# Altium PCB Pwr_PCB1.PcbDoc
Units mil, origin at the board's own origin, x right, y up, seen from the top; angles counter-clockwise.
Board outline 3900 x 3900 mil, 2 copper layers (Top Layer, Bottom Layer), stack 61.756 mil thick; 56 components, 20 nets, 130 pads, 18 vias.
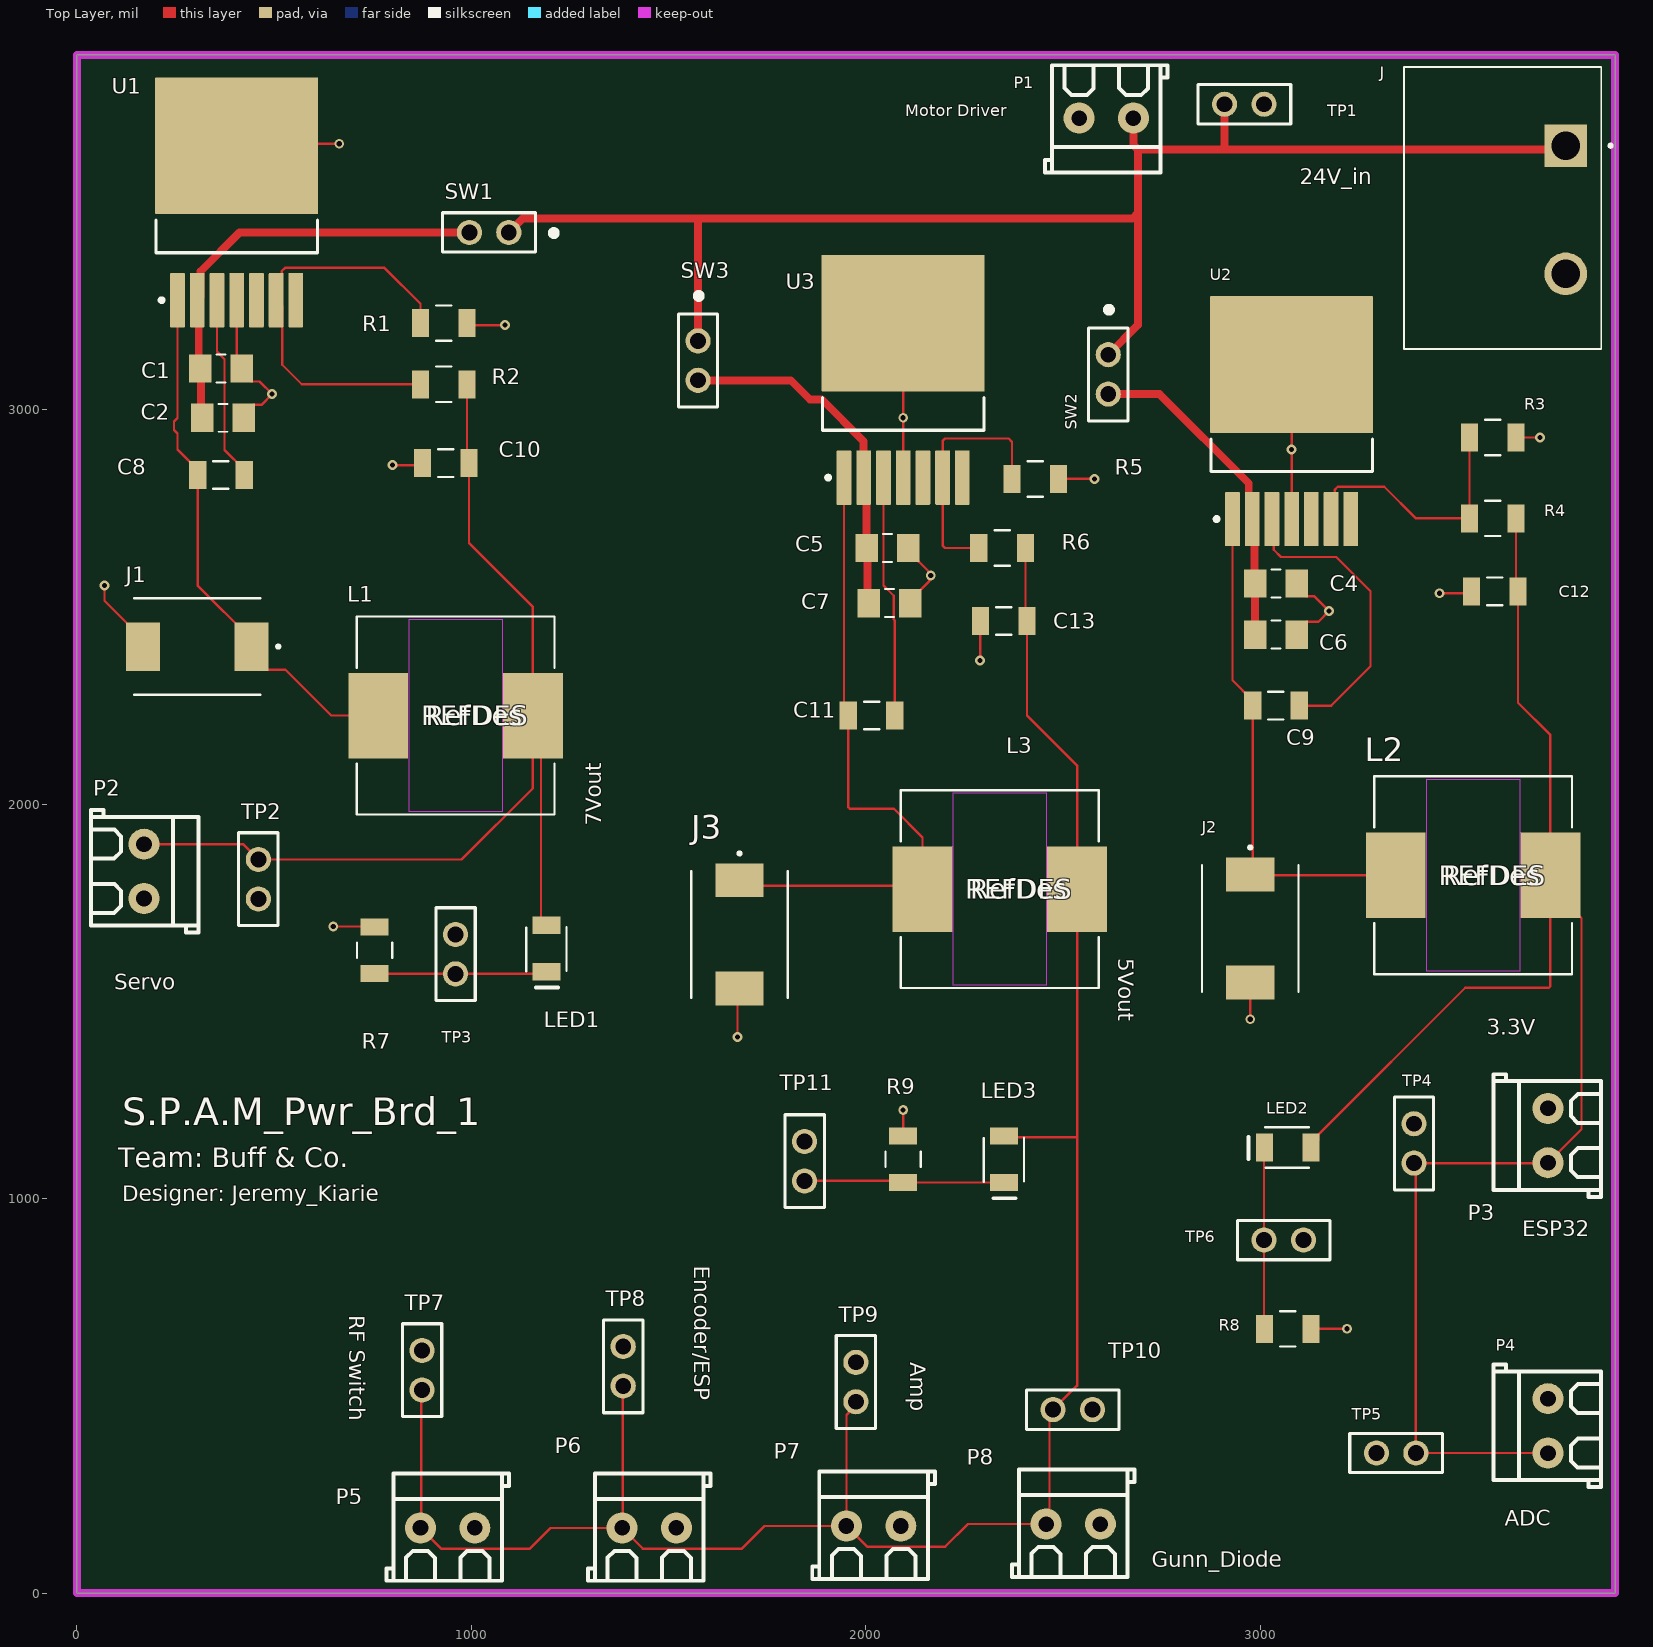
[diagram p0: Top Layer view]
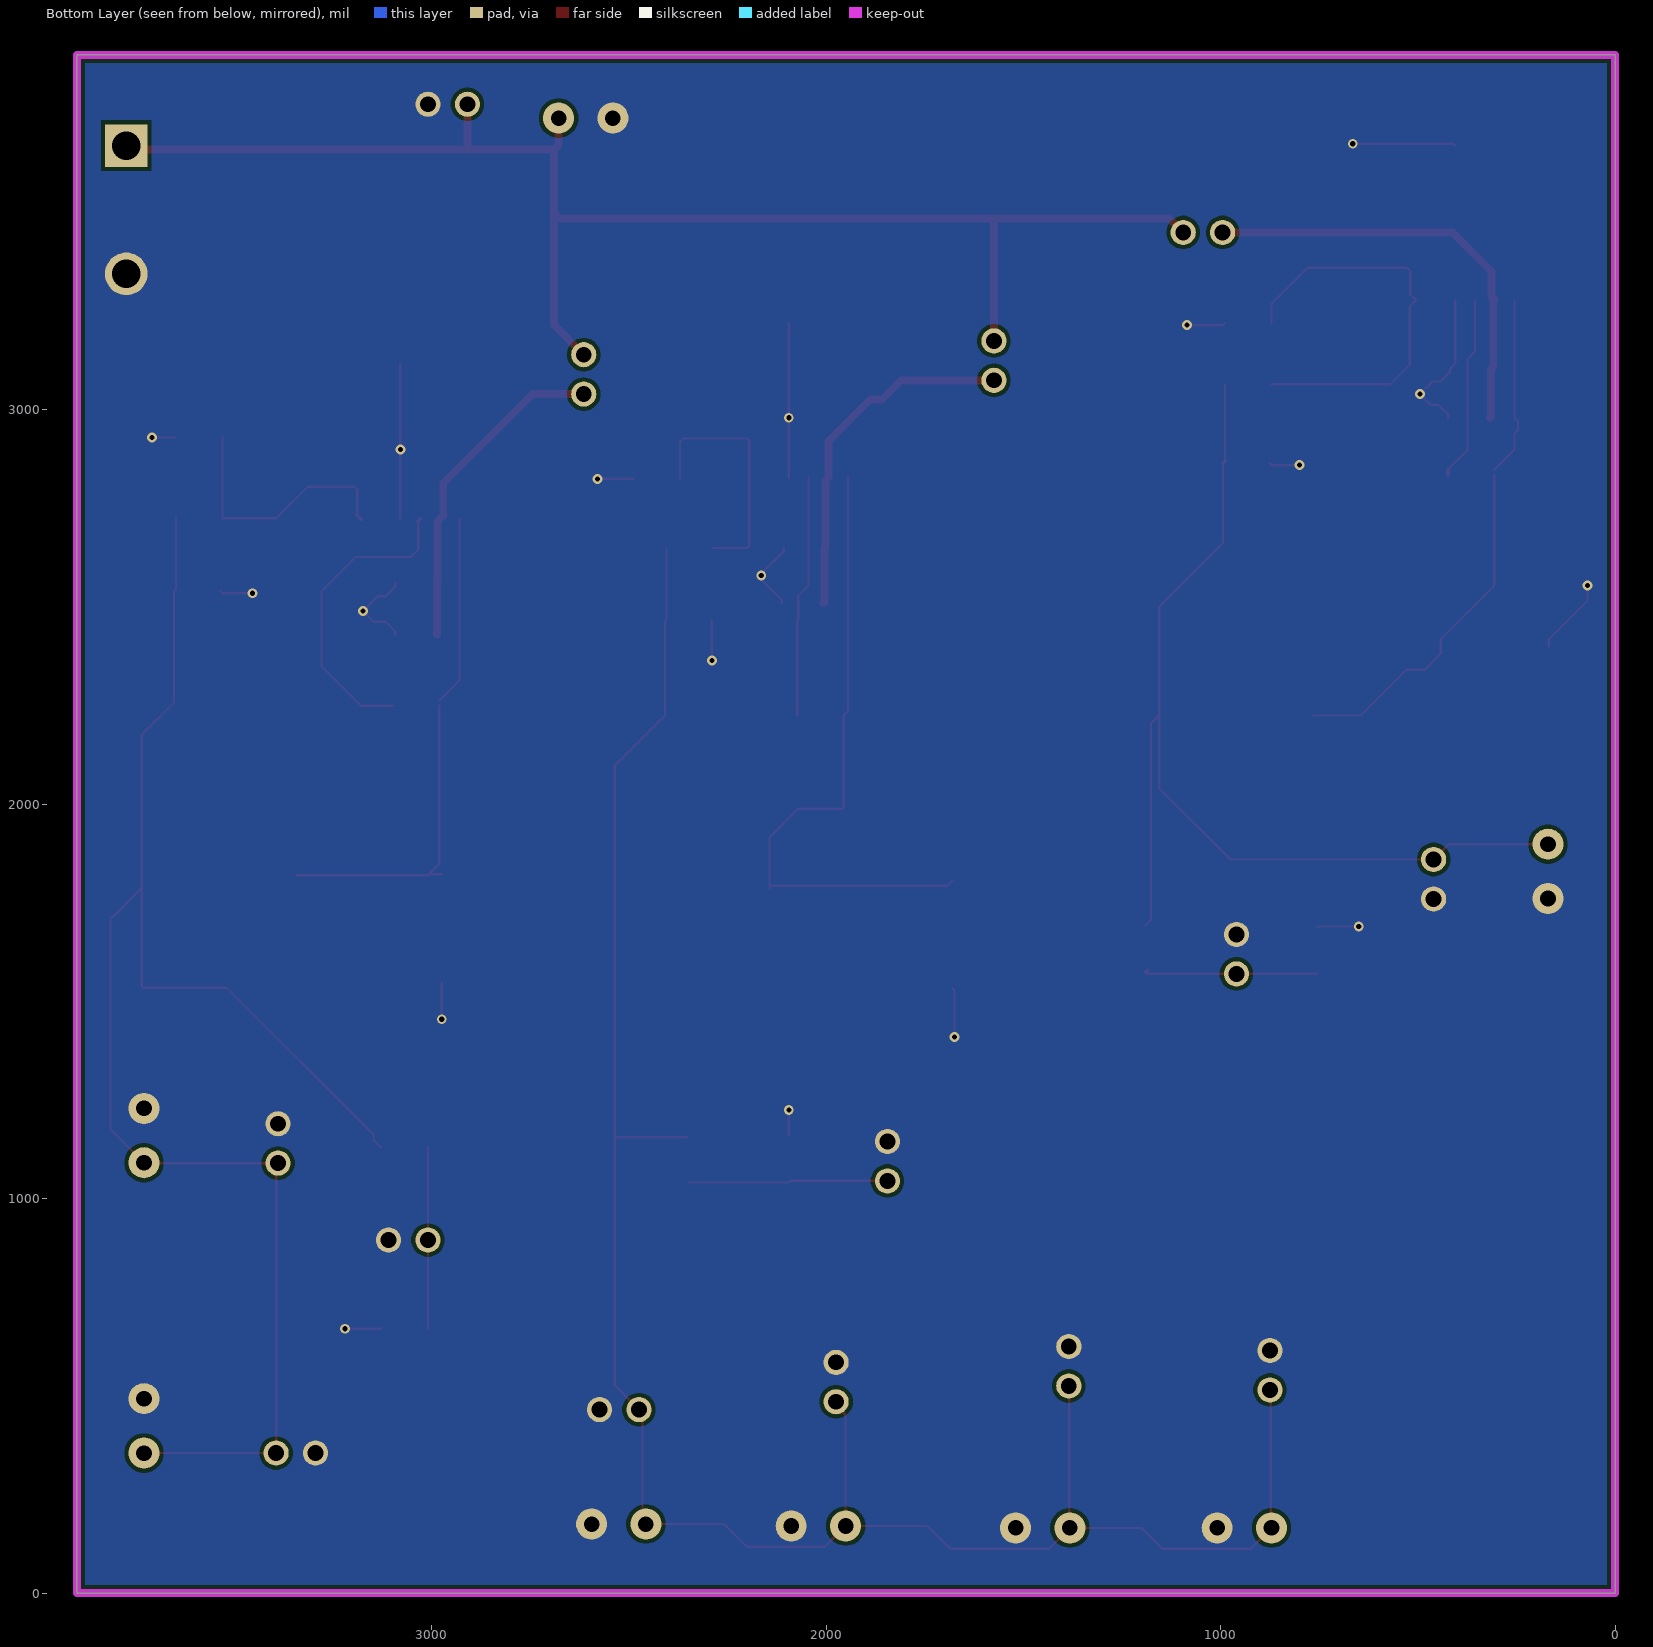
[diagram p1: Bottom Layer view, seen from below]
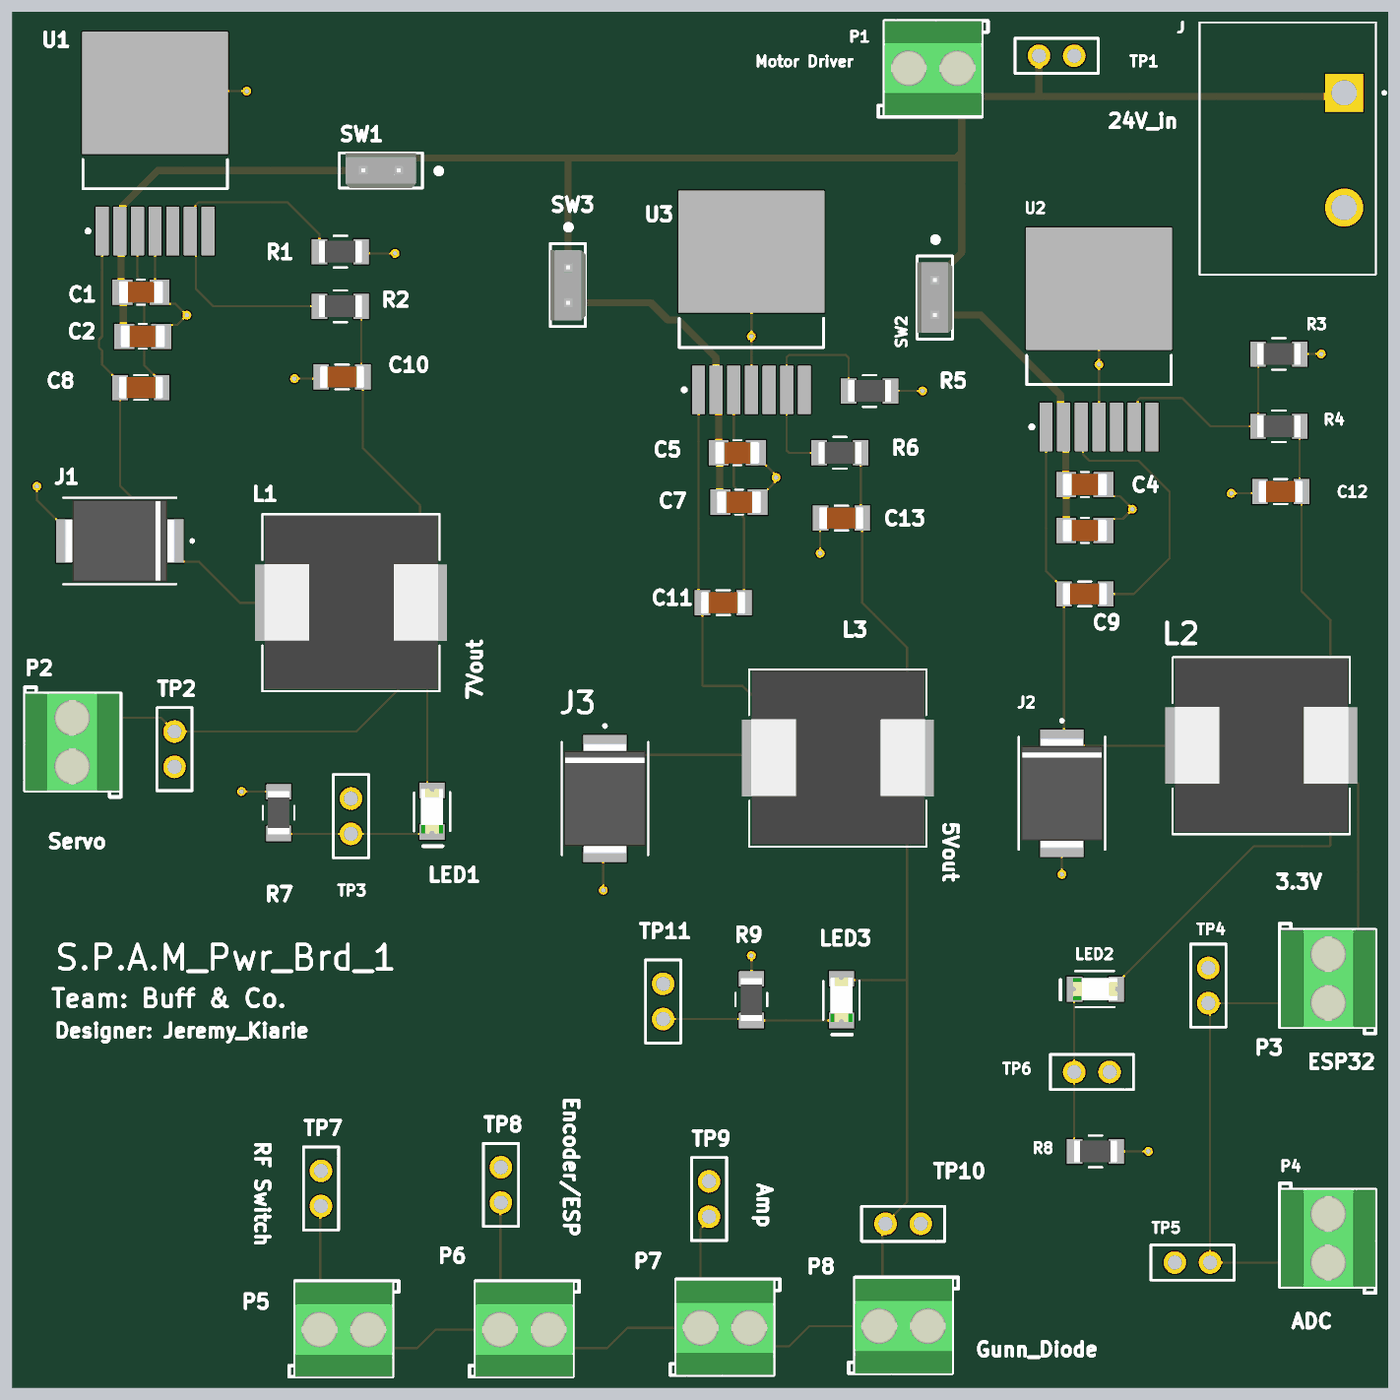
[diagram p2: 3D render of the assembled board from above, using the file's embedded part models]

## Layer stack, top to bottom
Top Solder: solder mask 1, SM-001, Dk 4
Top Layer: signal copper 1.378
Dielectric 1: core 59, Core-043, Dk 4.3
Bottom Layer: signal copper 1.378
Bottom Solder: solder mask 1, SM-001, Dk 4

## Board outline
0,0 3900,0 3900,3900 0,3900

## Design rules (kind name [scope] priority, off if disabled: settings)
Clearance [All] p1: gap=10 ignorepadtopadclearanceinfootprint=FALSE
PlaneClearance [All] p1: clearance=10
PlaneConnect [All] p1: planeconnectstyle=Direct reliefexpansion=20 reliefentries=4 reliefconductorwidth=10 reliefairgap=10
PolygonConnect [All] p1: connectstyle=Direct reliefconductorwidth=10 reliefentries=4 polygonreliefangle="90 Angle" airgapwidth=10
RoutingVias [All] p1: holewidth=13 width=25 viastyle="Through Hole" minholewidth=13 minwidth=25 maxholewidth=60 maxwidth=80
SolderMaskExpansion [All] p1: expansion=4 istentingtop=FALSE
SupplyNets "Schematic Supply Nets" [InNet('GND')] p1: voltage=0.000
UnRoutedNet [All] p1: checkbadconnections=TRUE
Width "Schematic Width Constraint_4" [InNet('NetC4_2')] p1: maxlimit=100 minlimit=10 preferedwidth=20 minimp=50.000000 maximp=50.000000 favimp=50.000000
Width "Schematic Width Constraint_3" [InNet('+24V')] p2: maxlimit=100 minlimit=10 preferedwidth=20 minimp=50.000000 maximp=50.000000 favimp=50.000000
Width "Schematic Width Constraint_2" [InNet('NetC5_2')] p3: maxlimit=100 minlimit=10 preferedwidth=20 minimp=50.000000 maximp=50.000000 favimp=50.000000
Width "Schematic Width Constraint_1" [InNet('NetC1_2')] p4: maxlimit=100 minlimit=10 preferedwidth=20 minimp=50.000000 maximp=50.000000 favimp=50.000000
Width [All] p5: maxlimit=10 minlimit=6 preferedwidth=6 minimp=50.000000 maximp=50.000000 favimp=50.000000
27 further rules are at their usual default settings.

## Components (designator, comment, footprint, x,y, rotation, side; value= is the part's Value field where it differs from the comment)
C1 "C3216X5R1E336M160AC" CAPC3216X180N 365,3105 r180 top
C2 "C3216X5R1E336M160AC" CAPC3216X180N 370,2980 r180 top
C4 "C3216X5R1E336M160AC" CAPC3216X180N 3040,2560 r180 top
C5 "C3216X5R1E336M160AC" CAPC3216X180N 2055,2650 r180 top
C6 "C3216X5R1E336M160AC" CAPC3216X180N 3040,2430 r180 top
C7 "C3216X5R1E336M160AC" CAPC3216X180N 2060,2510 r180 top
C8 "10nF" 1206_Passive_Capacitor 365,2835 r0 top
C9 "10nF" 1206_Passive_Capacitor 3040,2250 r0 top
C10 "22uF" 1206_Passive_Capacitor 935,2865 r0 top
C11 "10nF" 1206_Passive_Capacitor 2015,2225 r0 top
C12 "22uF" 1206_Passive_Capacitor 3595,2540 r0 top
C13 "22uF" 1206_Passive_Capacitor 2350,2465 r0 top
J "4DB-P108-02" TE_2-1437667-4 3775,3670 r270 top
J1 "SL44-E3/57T" DIOM7959X262N 305,2400 r180 top
J2 "SL44-E3/57T" DIOM7959X262N 2975,1685 r270 top
J3 "SL44-E3/57T" DIOM7959X262N 1680,1670 r270 top
L1 "DR127-220-R" DR127 960,2225 r0 top
L2 "DR127-220-R" DR127 3540,1820 r0 top
L3 "DR127-220-R" DR127 2340,1785 r0 top
LED1 "Red" LED_1206 1190,1634 r270 top
LED2 "Red" LED_1206 3070,1130 r180 top
LED3 "Red" LED_1206 2350,1100 r270 top
P1 "2P Screw Terminal Block" "P_Terminal block 3.5mm-pitch" 2610,3740 r180 top
P2 "2P Screw Terminal Block" "P_Terminal block 3.5mm-pitch" 170,1830 r270 top
P3 "2P Screw Terminal Block" "P_Terminal block 3.5mm-pitch" 3730,1160 r90 top
P4 "2P Screw Terminal Block" "P_Terminal block 3.5mm-pitch" 3730,423.9 r90 top
P5 "2P Screw Terminal Block" "P_Terminal block 3.5mm-pitch" 940,165 r0 top
P6 "2P Screw Terminal Block" "P_Terminal block 3.5mm-pitch" 1451.1,165 r0 top
P7 "2P Screw Terminal Block" "P_Terminal block 3.5mm-pitch" 2020,170 r0 top
P8 "2P Screw Terminal Block" "P_Terminal block 3.5mm-pitch" 2526.1,175 r0 top
R1 "1k" 1206_Passive_Resitor 930,3220 r0 top value="1K Ohm"
R2 "1K" 1206_Passive_Resitor 930,3065 r0 top value="4.75K Ohm"
R3 "1k" 1206_Passive_Resitor 3590,2930 r0 top value="1K Ohm"
R4 "1k" 1206_Passive_Resitor 3590,2725 r0 top value="1.72K Ohm"
R5 "1k" 1206_Passive_Resitor 2430,2825 r0 top value="1K Ohm"
R6 "1k" 1206_Passive_Resitor 2346,2650 r0 top value="3.16K Ohm"
R7 "1k" 1206_Passive_Resitor 755,1630 r90 top value="1K Ohm"
R8 "1k" 1206_Passive_Resitor 3070,670 r0 top value="1K Ohm"
R9 "1k" 1206_Passive_Resitor 2095,1100 r90 top value="1K Ohm"
SW1 "SW_2Pin_100mil_Switch" 2Pin-Header-Conn 1095,3450 r180 top
SW2 "SW_2Pin_100mil_Switch" 2Pin-Header-Conn 2615,3140 r270 top
SW3 "SW_2Pin_100mil_Switch" 2Pin-Header-Conn 1575,3175 r270 top
TP1 "10x Probe TP" TP_Diff_Probe 2910,3775 r0 top
TP2 "10x Probe TP" TP_Diff_Probe 460,1860 r270 top
TP3 "10x Probe TP" TP_Diff_Probe 960,1570 r90 top
TP4 "10x Probe TP" TP_Diff_Probe 3390,1090 r90 top
TP5 "10x Probe TP" TP_Diff_Probe 3395,355 r180 top
TP6 "10x Probe TP" TP_Diff_Probe 3010,895 r0 top
TP7 "10x Probe TP" TP_Diff_Probe 875,515 r90 top
TP8 "10x Probe TP" TP_Diff_Probe 1385,525 r90 top
TP9 "10x Probe TP" TP_Diff_Probe 1975,485 r90 top
TP10 "10x Probe TP" TP_Diff_Probe 2475,465 r0 top
TP11 "10x Probe TP" TP_Diff_Probe 1845,1045 r90 top
U1 "LM2678S-ADJ/NOPB" KTW0007B_N 405,3526.3 r90 top
U2 "LM2678S-ADJ/NOPB" KTW0007B_N 3080,2971.3 r90 top
U3 "LM2678S-ADJ/NOPB" KTW0007B_N 2095,3076.3 r90 top

## Footprints (in the part's own frame and the unit in brackets; to place one, negate y for a bottom-side part, rotate by r counter-clockwise, add the part's x,y. Pads: shape width x height; smd on the part's side, far side on the other; paste and mask are expansions set on the pad)
2Pin-Header-Conn [mm]
  round 1.62 hole 1.02: 1(0,0) 2(2.54,0)
  silkscreen extent -3.03,-1.27 4.26,1.26, body extent -1.27,-1.27 3.81,1.27, height 8.13
1206_Passive_Capacitor [mil]
  rect 44x71 smd: 1(-59,0) 2(59,0)
  silkscreen extent -19,-35 19,35, body extent -63,-31 63,32, height 50
1206_Passive_Resitor [mil]
  rect 44x71 smd: 1(-59,0) 2(59,0)
  silkscreen extent -19,-45 19,45, body extent -61,-31 61,31, height 26
CAPC3216X180N [mm]
  rect 1.44x1.82 smd: 1(-1.336,0) 2(1.336,0)
  silkscreen extent -0.29,-0.9 0.29,0.9, body extent -1.6,-0.8 1.6,0.8, height 1.8
DIOM7959X262N [mm]
  rect 2.18x3.12 smd: A(3.485,0) C(-3.485,0)
  silkscreen extent -5.32,-3.11 4.07,3.11, body extent -3.97,-2.96 3.97,2.96, height 2.62
DR127 [mil]
  rect 152x217 smd paste+0 mask+0: 1(-196,0) 2(196,0)
  Top Layer keep-out region: -118,-244 -118,244 118,244 118,-244
  silkscreen extent -251,-251 251,251, body extent -245,-245 247,247, height 315
KTW0007B_N [mm] "DPAK, 7-Leads, Body 9.4x10.4mm, Pitch 1.27mm, IPC Medium Density"
  rrect11% 3.5x0.95 smd: 1(-6.3,3.81) 2(-6.3,2.54) 3(-6.3,1.27) 4(-6.3,0) 5(-6.3,-1.27) 6(-6.3,-2.54) 7(-6.3,-3.81)
  rrect1% 8.8x10.5 smd: 8(3.65,0)
  silkscreen extent -6.42,-5.2 -1.15,5.2, body extent -3.25,-5.2 6.15,5.2, height 4.65
LED_1206 [mil]
  rect 44x71 smd: 1(-59,0) 2(59,0)
  silkscreen extent -54,-51 99,51, body extent -63,-31 63,31, height 28
"P_Terminal block 3.5mm-pitch" [mm]
  round 2 hole 1: 1(-1.75,0) 2(1.75,0)
  silkscreen extent -3.95,-3.4 3.95,3.5, body extent -3.5,-3.4 3.5,3.4, height 8.4
TE_2-1437667-4 [mil]
  rect 108x108 hole 72: 1(0,0)
  round 108 hole 72: 2(325,0)
  silkscreen extent -200,-410 515,118
TP_Diff_Probe [mm]
  round 1.62 hole 1.02: 1(0,0) 2(2.54,0)
  silkscreen extent -1.72,-1.27 4.26,1.26

## Part data
C1 C2 C4 C5 C6 C7: "Cap Ceramic 33uF 25V X5R 20% Pad SMD 1206 85Â°C Low ESR T/R", Package="3216 TDK", Check_prices=https://www.snapeda.com/parts/C3216X5R1E336M160AC/TDK/view-part/?ref=eda, MF="TDK Electronics", MP=C3216X5R1E336M160AC, SnapEDA_Link=https://www.snapeda.com/parts/C3216X5R1E336M160AC/TDK/view-part/?ref=snap
C8 C9 C11: library part C_10nF_1206, "10nF 50V X7R ±10% 1206 Multilayer Ceramic Capacitors MLCC - SMD/SMT ROHS", LCSC Part#=C1848, MFR Part #=CL31B105KBHNNNE, Digikey Link=https://www.digikey.com/product-detail/en/C1206C105M4RACTU/399-8150-1-ND/3471873/?itemSeq=304982366, Type=Basic
C10 C12 C13: library part C_22uF_1206, "22uF ±10% 25V X5R 1206 Multilayer Ceramic Capacitors MLCC - SMD/SMT RoHS", LCSC Part#=C12891, MFR Part #=CL31A226KAHNNNE, Datasheet=https://datasheet.lcsc.com/lcsc/1811031514_Samsung-Electro-Mechanics-CL31A226KAHNNNE_C12891.pdf, Type=basic
J: "Conn; Term Strip; Barrier; 2Pole; 8.26mmPitch; SnglRow; 22-12; Series 4DB; 20A; 150V", Package=None, Availability=Unavailable, MF="TE Connectivity", MP=4DB-P108-02, Price=None, SnapEDA_Link=https://www.snapeda.com/parts/4DB-P108-02/TE%20Connectivity%20AMP%20Connectors/view-part/2743721/?ref=snap, TE_purchase_URL=https://www.te.com/usa-en/product-2-1437667-4.html?te_bu=Cor&te_type=disp&te_campaign=seda_glo_cor-seda-global-disp-prtnr-fy19-seda-model-bom-cta_sma-317_1&elqCampaignId=32493
J1 J2 J3: "Diode Schottky 40 V 4A Surface Mount DO-214AB (SMC)", Package="DO-214 Vishay", Check_prices=https://www.snapeda.com/parts/SL44-E3/57T/Vishay/view-part/?ref=eda, MF="Vishay Semiconductor", MP=SL44-E3/57T, SnapEDA_Link=https://www.snapeda.com/parts/SL44-E3/57T/Vishay/view-part/?ref=snap
L1 L2 L3: "Description", Manufacturer_Name=Eaton, Copyright="Copyright (C) 2025 Ultra Librarian. All rights reserved.", Manufacturer_Part_Number=DR127-220-R
LED1 LED2 LED3: library part LED_RED_1206, "Red 621~631nm 1206 Light Emitting Diodes (LED) RoHS", LCSC Part#=C93133, MFR Part #=15-21/R6C-FQ1R1B/2T, Datasheet=https://datasheet.lcsc.com/szlcsc/1811151241_Everlight-Elec-15-21-R6C-FQ1R1B-2T_C93133.pdf, Type=Extended
P1 P2 P3 P4 P5 P6 P7 P8: library part "P_Terminal block", "Green Straight pin 3.5mm  pitch; P=3.5mm  Screw terminal ROHS", LCSC Part#=C474892, Manufacturer="Cixi Kefa Elec", MFR Part #=KF350-3.5-2P, Datasheet=https://datasheet.lcsc.com/lcsc/2001160007_Cixi-Kefa-Elec-KF350-3-5-2P_C474892.pdf
R1 R2 R3 R4 R5 R6 R7 R8 R9: library part R_1K_1206, "CHIP RESISTOR - SURFACE MOUNT 1KOHMS ±1% 1/4W 1206 ROHS", LCSC Part#=C4410, MFR Part #=RNCP1206FTD1K00CT, Digikey Link=https://www.digikey.com/product-detail/en/RNCP1206FTD1K00/RNCP1206FTD1K00CT-ND/2240675/?itemSeq=304982373, Type=Basic
SW1 SW2 SW3: "2Pin Header", LCSC Part#=C124375, Type=Extended
TP1 TP2 TP3 TP4 TP5 TP6 TP7 TP8 TP9 TP10 TP11: library part TP_Diff_Probe, "Test Point 300 mil centers"
U1 U2 U3: library part CMP-0069-00191-3, "SIMPLE SWITCHER® High Efficiency 5A Step-Down Voltage Regulator, 7-pin TO-263, Pb-Free", Manufacturer="Texas Instruments", PackageTopMarking=NSUZXYTTE#*LM2678*S-ADJ, PowerWise=N, Code_JEDEC=MO-169-AC, ComponentLink1Description="Datasheet URL", ComponentLink1URL=http://www.ti.com/general/docs/lit/getliterature.tsp?genericPartNumber=LM2678&fileType=pdf, CompType=Switcher, PackageDescription="TO-263, Molded, .400 x .390 x .180in Body, 7 Lead, .050in Pitch, Surface Mount", PackageReference=KTW0007B, PinCount=7, RoHS=Y

## Via types
v1: diameter 25, hole 13, Top Layer to Bottom Layer, 18 vias

## Nets (pads, with @x,y where several pads share a name; then routed paths per layer and width w, separated by ;. In a path a pad name is that pad's centre, name@x,y a point inside that pad or via, vN(x,y) a via of type N, cw(c..) or ccw(c..) an arc to the next point about the centre after c; other vN are vias at no path point)
+24V: J.1 P1.1 SW1.1 SW2.1 SW3.1 TP1.1 | length 3766
  Top Layer w20: SW1.1 1130,3485 1575,3485 ; SW3.1 1575,3485 ; SW2.1 2690.61,3215.61 2690.61,3500 ; P1.1 2678.9,3671.72 2690.61,3660 ; TP1.1 2910,3660 ; J.1 3765,3660 2910,3660 ; 1575,3485 2675.61,3485 2690.61,3500 ; 2690.61,3500 2690.61,3660 ; 2690.61,3660 2910,3660
GND: C1.1 C2.1 C4.1 C5.1 C6.1 C7.1 C10.1 C12.1 C13.1 J1.A J2.A J3.A J.2 P1.2 P2.2 P3.2 P4.2 P5.2 P6.2 P7.2 P8.2 R1.2 R3.2 R5.2 R7.2 R8.2 R9.2 TP1.2 TP2.2 TP3.2 TP4.2 TP5.2 TP6.2 TP7.2 TP8.2 TP9.2 TP10.2 TP11.2 U1.4 U1.8 U2.4 U2.8 U3.4 U3.8 | length 3034.5
  Top Layer w6: v1(70,2555) 70,2516.3 167.8,2418.5 J1.A ; U1.4 405,3117.6 C1.1 417.6,3097.52 442.94,3072.17 462.83,3072.17 v1(495,3040) 467.83,3012.83 447.94,3012.83 422.6,2987.48 C2.1 ; U1.8 410,3675 v1(665,3675) ; v1(650,1690) 754,1690 R7.2 ; v1(800,2860) 871,2860 C10.1 ; R1.2 994,3215 v1(1085,3215) ; v1(1675,1410) 1675,1527.8 J3.A ; R9.2 v1(2095,1225) ; U3.4 v1(2095,2980) U3.8 ; C5.1 2107.6,2642.52 2165,2585.12 v1(2165,2580) 2161.36,2576.36 2161.36,2566.25 2112.6,2517.48 C7.1 ; v1(2290,2365) 2290,2464 C13.1 ; R5.2 v1(2580,2825) ; v1(2975,1455) J2.A ; U2.4 v1(3080,2900) U2.8 ; C6.1 3092.6,2437.48 3117.94,2462.83 3147.83,2462.83 v1(3175,2490) 3137.83,2527.17 3117.94,2527.17 3092.6,2552.52 C4.1 ; R8.2 v1(3220,670) ; v1(3455,2535) 3531,2535 C12.1 ; R3.2 v1(3710,2930)
NetC1_2: C1.2 C2.2 SW1.2 U1.2 | length 1102.4
  Top Layer w20: C2.2 314.9,2982.5 314.9,3102.5 308.7,3108.7 308.7,3274.57 U1.2 313.7,3286.97 313.7,3351.65 412.06,3450 SW1.2
NetC4_2: C4.2 C6.2 SW2.2 U2.2 | length 840.4
  Top Layer w20: SW2.2 2745,3040 2971.3,2813.7 2971.3,2731.97 U2.2 2985.84,2717.43 2985.84,2561.56 C4.2 C6.2
NetC5_2: C5.2 C7.2 SW3.2 U3.2 | length 898.4
  Top Layer w20: SW3.2 1810,3075 1858.23,3026.77 1888.23,3026.77 1994.61,2920.39 U3.2@1994.61,2828.66 ; U3.2@1995.26,2828.01 2002.4,2820.87 C5.2 2004.9,2647.5 2004.9,2512.5 C7.2
NetC8_1: C8.1 J1.C L1.1 U1.1 | length 1354.8
  Top Layer w6: U1.1 255,2979.76 246.06,2970.81 246.06,2949.26 255,2940.32 255,2899.5 C8.1@306,2848.5 ; C8.1 306,2554.71 442.2,2418.5 J1.C 442.2,2381.5 482.12,2341.58 528.27,2341.58 644.85,2225 L1.1
NetC8_2: C8.2 U1.3 | length 471.8
  Top Layer w6: U1.3 355,3147.79 374.25,3128.54 374.25,2898.25 C8.2@424,2848.5
  Top Layer w10: C8.2 C8.2@424,2848.5
NetC9_1: C9.1 J2.C L2.1 U2.1 | length 1292.2
  Top Layer w6: U2.1 2930,2314.5 C9.1@2981,2263.5 ; J2.C J2.C@3006.3,1822.2 ; C9.1 2981,1849.71 3008.5,1822.2 J2.C@3006.3,1822.2 ; L2.1 3008.5,1820 J2.C@3006.3,1822.2
NetC9_2: C9.2 U2.3 | length 781.3
  Top Layer w6: U2.3@3034.77,2718.5 3034.77,2645.23 3053,2627 3193,2627 3280,2540 3280,2350 3180,2250 C9.2
  Top Layer w10: U2.3 U2.3@3034.77,2718.5
NetC10_2: C10.2 L1.2 LED1.1 P2.1 R2.2 TP2.1 | length 2716.6
  Top Layer w6: P2.1 421.1,1898.9 TP2.1 975.38,1860 1156,2040.62 L1.2 ; C10.2@989,2870 R2.2 ; C10.2 994,2662.5 1156,2500.5 L1.2 ; LED1.1 1176.5,1706.5 1176.5,2204.5 L1.2
  Top Layer w10: C10.2@989,2870 C10.2
NetC11_1: C11.1 J3.C L3.1 U3.1 | length 1660.6
  Top Layer w6: J3.C 1693.54,1793.66 L3.1@2144,1793.66 ; U3.1 1945,2236 C11.1 1956,1992.51 1959.51,1989 2071,1989 2144,1916 L3.1@2144,1793.66 ; L3.1 L3.1@2144,1793.66
NetC11_2: C11.2 U3.3 | length 615.3
  Top Layer w6: U3.3 2045,2554.96 2071.25,2528.71 2071.25,2468.79 2074,2466.04 C11.2
NetC12_2: C12.2 L2.2 LED2.1 P3.1 P4.1 R4.2 TP4.1 TP5.1 | length 4185.2
  Top Layer w6: LED2.1 3148,1149 3148,1163 3520,1535 3732.49,1535 3736,1538.51 L2.2@3736,1787.5 ; R4.2 3649,2545 C12.2 3654,2257.5 3736,2175.5 L2.2 L2.2@3736,1787.5 ; P4.1 TP5.1 3395,1085 TP4.1 3728.9,1090 P3.1 3815,1176.1 3815,1710.99 3811.49,1714.5 3809,1714.5 L2.2@3736,1787.5
NetC13_2: C13.2 L3.2 LED3.1 P5.1 P6.1 P7.1 P8.1 R6.2 TP7.1 TP8.1 TP9.1 TP10.1 | length 5514.5
  Top Layer w6: TP7.1 873.05,513.05 873.05,166.95 P5.1 923.47,112.63 1148.68,112.63 1201.05,165 P6.1 ; TP8.1 1383.6,523.6 1383.6,166.4 P6.1 ; TP9.1 1975,474.97 1951.1,451.07 P7.1 ; LED3.1 2353.5,1155.5 2536,1155.5 ; R6.2 2405,2469 C13.2 2409,2225 2536,2098 L3.2 2536,1155.5 ; P6.1 1434.57,112.63 1686.18,112.63 1743.55,170 P7.1 ; P7.1 2003.47,117.63 2201.65,117.63 2259.02,175 P8.1 2466.1,183.9 2466.1,456.1 TP10.1 2536,526 2536,1155.5
  Top Layer w10: TP7.1 TP7.1@880,520
NetLED1_2: LED1.2 R7.1 TP3.1 | length 443.1
  Top Layer w6: R7.1 756,1570 TP3.1 1185,1570 LED1.2
  Top Layer w10: LED1.2@1186,1579 LED1.2
NetLED2_2: LED2.2 R8.1 TP6.1 | length 460.8
  Top Layer w6: R8.1 3010,671 TP6.1 3010,1129 LED2.2
NetLED3_2: LED3.2 R9.1 TP11.1 | length 506.7
  Top Layer w6: TP11.1 2091,1045 R9.1 LED3.2
NetR1_1: R1.1 R2.1 U1.6 | length 1062.6
  Top Layer w6: R2.1 570,3065 520.7,3114.3 520.7,3262.57 U1.6 518.9,3292.17 518.9,3351.49 527.58,3360.17 779.83,3360.17 871,3269 R1.1
NetR3_1: R3.1 R4.1 U2.6 | length 661.2
  Top Layer w6: U2.6@3189.57,2732.83 3189.57,2797.79 3196.94,2805.17 3314.83,2805.17 3395,2725 R4.1 R3.1
  Top Layer w10: U2.6 U2.6@3189.57,2732.83
NetR5_1: R5.1 R6.1 U3.6 | length 635.9
  Top Layer w6: U3.6@2194.9,2828.17 2194.9,2655.86 2200.76,2650 R6.1 ; U3.6 2195,2921.47 2200.86,2927.33 2362.67,2927.33 2371,2919 R5.1
pads on no net: U1.5 U1.7 U2.5 U2.7 U3.5 U3.7

## Polygon pours and split planes (outlines as drawn)
GND on Bottom Layer "GND_L02_P000" (solid, pour order 0): 0,3900 3900,3900 3900,0 0,0

## Keep-outs
Keep-Out Layer:
  the board outline again, w20

## Silkscreen, mask and mechanical layers (free items; w line width, h text height)
Top Overlay:
  text "Motor Driver" at 2100,3745 h30
  text "24V_in" at 3100,3571.66 h40
  text "7Vout" at 1330,1945 h40 r90
  text "5Vout" at 2640,1610 h40 r270
  text "Servo" at 95,1530 h40
  text "3.3V" at 3575,1415 h40
  text "S.P.A.M_Pwr_Brd_1" at 115,1186.66 h70
  text "Team: Buff & Co." at 105,1080 h50
  text "Designer: Jeremy_Kiarie" at 115,993.33 h40
  text "ESP32" at 3665,905 h40
  text "Encoder/ESP" at 1565,830 h40 r270
  text "RF Switch" at 690,705 h40 r270
  text "Amp" at 2113.33,585 h40 r270
  text "ADC" at 3620,170 h40
  text "Gunn_Diode" at 2725,65 h40 r0.1

## Text inside footprints (layer, text, board x,y; h text height)
L1: Top Overlay "RefDes" at 885,2200 h50; Top Overlay "REFDES" at 872.5,2200 h50; Mechanical 13 "RefDes2" at 872.5,2200 h50
L2: Top Overlay "RefDes" at 3465,1795 h50; Top Overlay "REFDES" at 3452.5,1795 h50; Mechanical 13 "RefDes2" at 3452.5,1795 h50
L3: Top Overlay "RefDes" at 2265,1760 h50; Top Overlay "REFDES" at 2252.5,1760 h50; Mechanical 13 "RefDes2" at 2252.5,1760 h50